# Altium PCB PCB_Thesis.PcbDoc
Units mil, origin at the board's own origin, x right, y up, seen from the top; angles counter-clockwise.
Board outline 3160 x 1935 mil, 2 copper layers (Top Layer, Bottom Layer); 15 components, 29 nets, 152 pads, 1 vias.
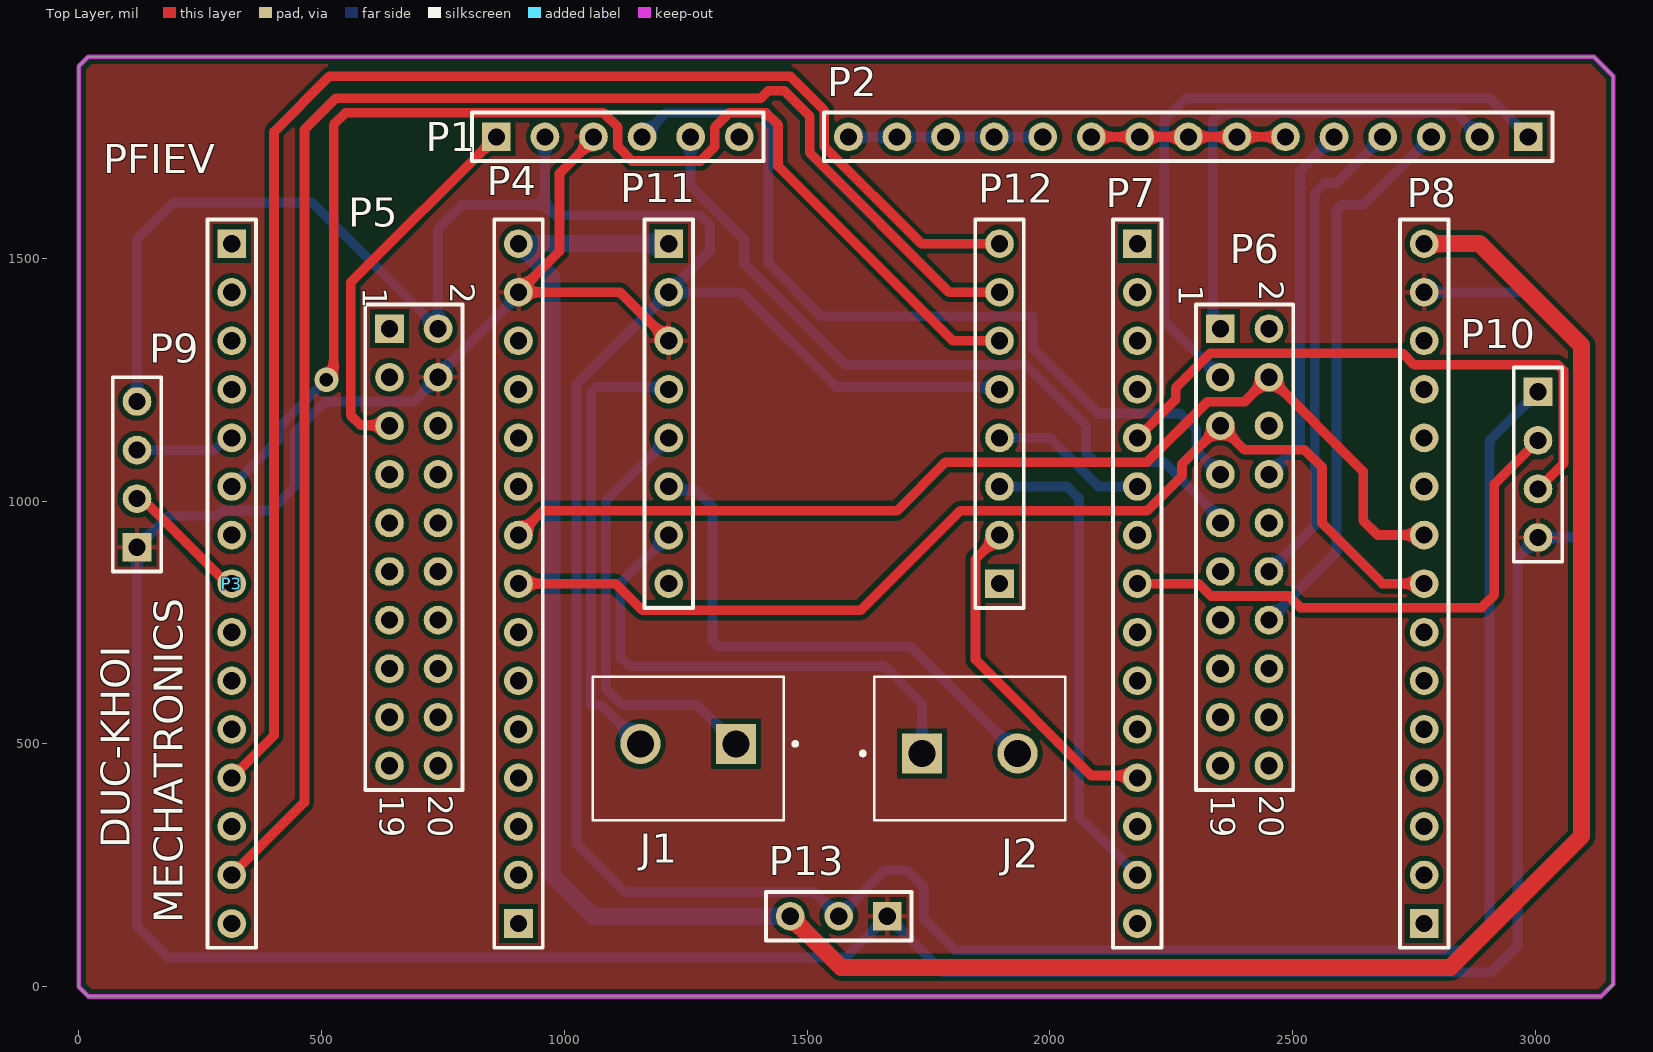
[diagram p0: Top Layer view]
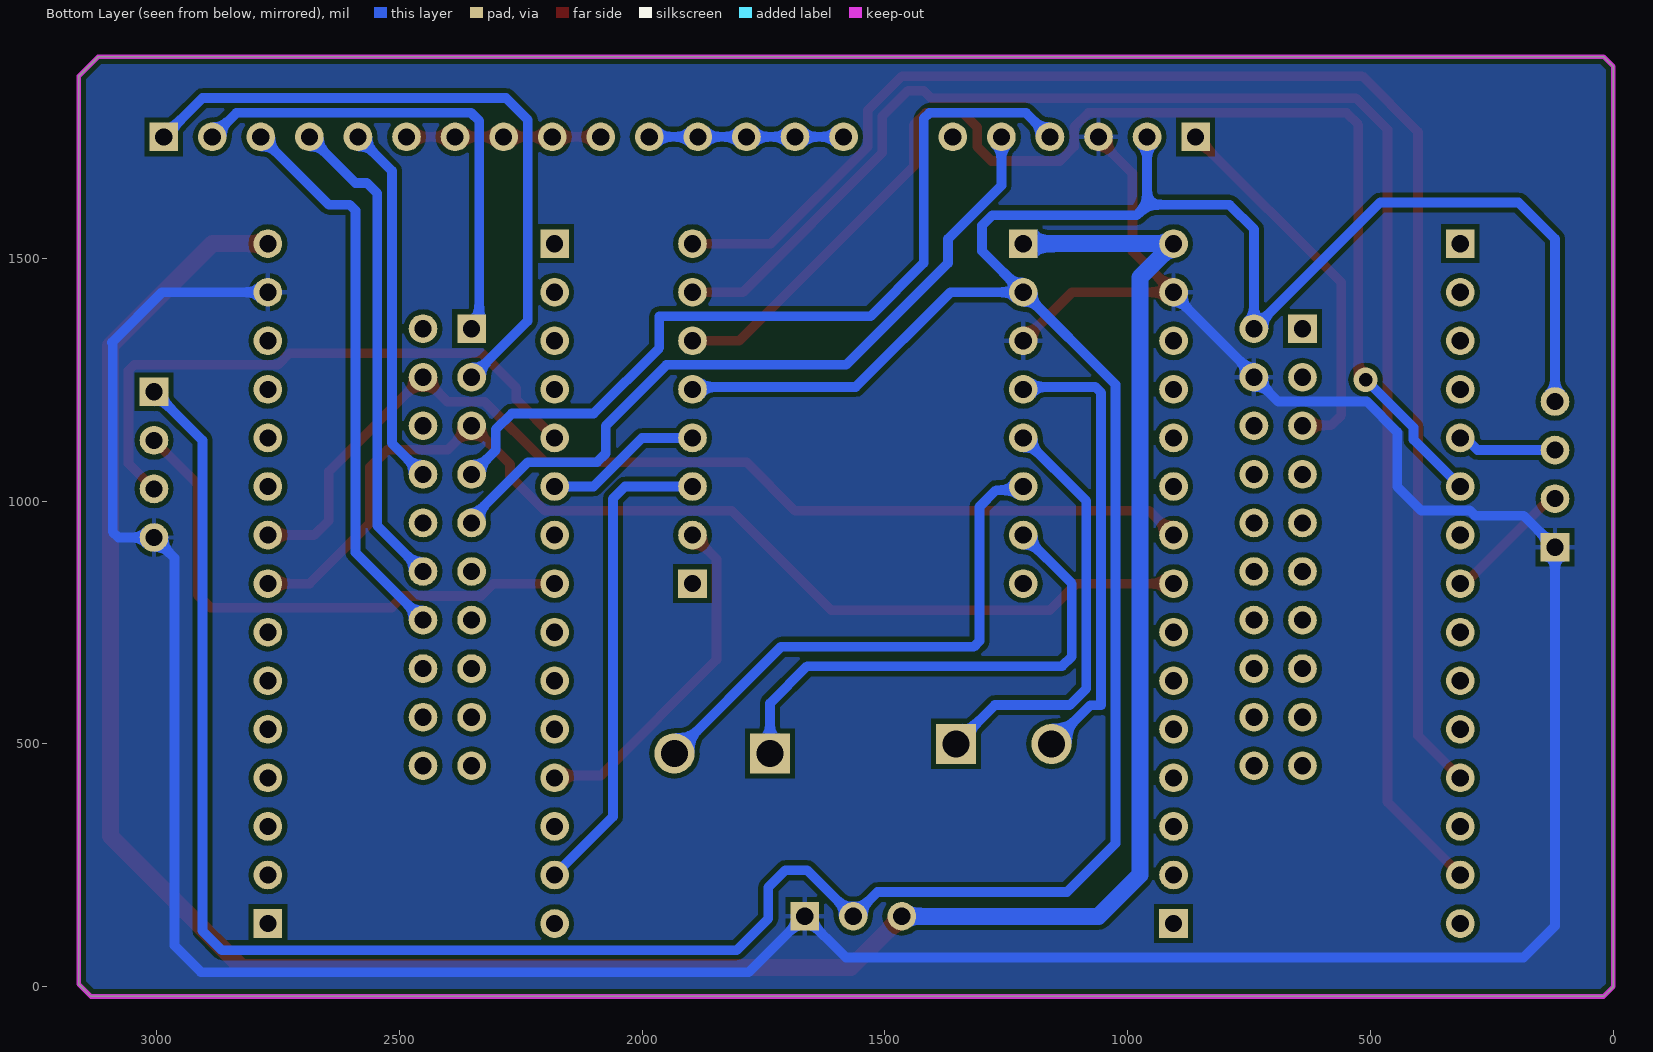
[diagram p1: Bottom Layer view, seen from below]

## Layer stack, top to bottom
Top Solder: solder mask 0.4, Solder Resist, Dk 3.5
Top Layer: signal copper 1.4
Dielectric 1: dielectric 12.6, FR-4, Dk 4.8
Bottom Layer: signal copper 1.4
Bottom Solder: solder mask 0.4, Solder Resist, Dk 3.5

## Board outline
0,0 20,-20 3135,-20 3160,5 3160,1875 3120,1915 20,1915 0,1895

## Design rules (kind name [scope] priority, off if disabled: settings)
Clearance [All] p1: gap=10 ignorepadtopadclearanceinfootprint=FALSE except(0: Arc-Hole Track-Hole SMDPad-Hole THPad-Hole Via-Hole Fill-Hole Poly-Hole Region-Hole Text-Hole)
PolygonConnect [All] p1: connectstyle=Relief reliefconductorwidth=10 reliefentries=4 polygonreliefangle="90 Angle" airgapwidth=10
RoomDefinition Schematic_Thesis [InComponentClass('Schematic_Thesis')] p1: confinementstyle=ConfineIn formatcopy=TRUE lockcomponents=FALSE outline -2575,-2075 -575,-2075 -575,-1075 -2575,-1075
RoutingVias [All] p1: holewidth=28 width=50 viastyle="Through Hole" minholewidth=28 minwidth=50 maxholewidth=28 maxwidth=50
SolderMaskExpansion [All] p1: expansion=4 istentingtop=FALSE
Width [All] p1: maxlimit=35 minlimit=20 preferedwidth=20
30 further rules are at their usual default settings.

## Components (designator, comment, footprint, x,y, rotation, side; value= is the part's Value field where it differs from the comment)
J1 "Domino 1" HANDSON_KF301-2P 1255,500 r180 top
J2 "Domino 2" HANDSON_KF301-2P 1835,480.32 r0 top
P1 "HC-05" HDR1X6 860,1750 r0 top
P2 "RC Servo" HDR1X15 2985,1750 r180 top
P3 "Arduino - L1" HDR1X15 315,1530 r270 top
P4 "Arduino - R1" HDR1X15 905.5,130 r90 top
P5 "Tiva C - L" HDR2X10 640,1355 r270 top
P6 "Tiva C - R" HDR2X10 2351,1355 r270 top
P7 "Arduino - L2" HDR1X15 2180,1530 r270 top
P8 "Arduino - R2" HDR1X15 2770.5,130 r90 top
P9 "Motor 1" HDR1X4 120,905 r90 top
P10 "Motor 2" HDR1X4 3005,1225 r270 top
P11 "TB6612 - L" HDR1X8 1215,1530 r270 top
P12 "TB6612 - R" HDR1X8 1896.1,830 r90 top
P13 "Voltage Supply" HDR1X3 1665,145 r180 top

## Footprints (in the part's own frame and the unit in brackets; to place one, negate y for a bottom-side part, rotate by r counter-clockwise, add the part's x,y. Pads: shape width x height; smd on the part's side, far side on the other; paste and mask are expansions set on the pad)
HANDSON_KF301-2P [mm]
  rect 2.1x2.1 hole 1.4: 1(-2.5,0)
  round 2.1 hole 1.4: 2(2.5,0)
  silkscreen extent -5.7,-3.5 5,4
HDR1X3 [mm] "Connector; Header; 3 Position"
  rect 1.5x1.5 hole 0.9: 1(0,0)
  round 1.5 hole 0.9: 2(2.54,0) 3(5.08,0)
  silkscreen extent -1.27,-1.27 6.35,1.27
HDR1X4 [mm] "Connector; Header; 4 Position"
  rect 1.5x1.5 hole 0.9: 1(0,0)
  round 1.5 hole 0.9: 2(2.54,0) 3(5.08,0) 4(7.62,0)
  silkscreen extent -1.27,-1.27 8.89,1.27
HDR1X6 [mm] "Connector; Header; 6 Position"
  rect 1.5x1.5 hole 0.9: 1(0,0)
  round 1.5 hole 0.9: 2(2.54,0) 3(5.08,0) 4(7.62,0) 5(10.16,0) 6(12.7,0)
  silkscreen extent -1.27,-1.27 13.97,1.27
HDR1X8 [mm] "Connector; Header; 8 Position"
  rect 1.5x1.5 hole 0.9: 1(0,0)
  round 1.5 hole 0.9: 2(2.54,0) 3(5.08,0) 4(7.62,0) 5(10.16,0) 6(12.7,0) 7(15.24,0) 8(17.78,0)
  silkscreen extent -1.27,-1.27 19.05,1.27
HDR1X15 [mm] "Connector; Header; 15 Position"
  rect 1.5x1.5 hole 0.9: 1(0,0)
  round 1.5 hole 0.9: 2(2.54,0) 3(5.08,0) 4(7.62,0) 5(10.16,0) 6(12.7,0) 7(15.24,0) 8(17.78,0) 9(20.32,0) 10(22.86,0) 11(25.4,0) 12(27.94,0) 13(30.48,0) 14(33.02,0) 15(35.56,0)
  silkscreen extent -1.27,-1.27 36.83,1.27
HDR2X10 [mm] "Connector; Header; 10x2 Position"
  rect 1.5x1.5 hole 0.9: 1(0,0)
  round 1.5 hole 0.9: 2(0,2.54) 3(2.54,0) 4(2.54,2.54) 5(5.08,0) 6(5.08,2.54) 7(7.62,0) 8(7.62,2.54) 9(10.16,0) 10(10.16,2.54) 11(12.7,0) 12(12.7,2.54) 13(15.24,0) 14(15.24,2.54) 15(17.78,0) 16(17.78,2.54) 17(20.32,0) 18(20.32,2.54) 19(22.86,0) 20(22.86,2.54)
  silkscreen extent -1.27,-1.27 24.13,3.81

## Part data
J1 J2: library part KF301-2P, "2 Pin Terminal Block 5mm Pitch", Package=Package, Availability=Unavailable, MF="Handson Technology", MP=KF301-2P, Price=None, SnapEDA_Link=https://www.snapeda.com/parts/KF301-2P/Handson%20Technology/view-part/4276957/?ref=snap
P1: library part "Header 6", "Header, 6-Pin", LatestRevisionDate=17-Jul-2002, LatestRevisionNote="Re-released for DXP Platform.", Publisher="Altium Limited"
P2 P3 P4 P7 P8: library part "Header 15", "Header, 15-Pin", LatestRevisionDate=17-Jul-2002, LatestRevisionNote="Re-released for DXP Platform.", Publisher="Altium Limited"
P5 P6: library part "Header 10X2", "Header, 10-Pin, Dual row", LatestRevisionDate=17-Jul-2002, LatestRevisionNote="Re-released for DXP Platform.", Publisher="Altium Limited"
P9 P10: library part "Header 4", "Header, 4-Pin", LatestRevisionDate=17-Jul-2002, LatestRevisionNote="Re-released for DXP Platform.", Publisher="Altium Limited"
P11 P12: library part "Header 8", "Header, 8-Pin", LatestRevisionDate=17-Jul-2002, LatestRevisionNote="Re-released for DXP Platform.", Publisher="Altium Limited"
P13: library part "Header 3", "Header, 3-Pin", LatestRevisionDate=17-Jul-2002, LatestRevisionNote="Re-released for DXP Platform.", Publisher="Altium Limited"

## Via types
v1: diameter 50, hole 28, Top Layer to Bottom Layer, 1 vias

## Nets (pads, with @x,y where several pads share a name; then routed paths per layer and width w, separated by ;. In a path a pad name is that pad's centre, name@x,y a point inside that pad or via, vN(x,y) a via of type N, cw(c..) or ccw(c..) an arc to the next point about the centre after c; other vN are vias at no path point)
5V: P1.2 P5.2 P9.4 P10.1 P11.2 P12.5 P13.2 | length 7443.4
  Bottom Layer w20: P9.4 120,1540 195,1615 480,1615 P5.2 740,1560 790,1610 960,1610 ; P1.2 960,1610 ; P12.5 1891.1,1235 1560,1235 1365,1430 P11.2 ; P10.1 2905,1125 2905,115 2865,75 1805,75 1740,140 1740,205 1705,240 1660,240 P13.2 1515,195 1125,195 1025,295 1025,1240 P11.2 ; 960,1610 981.21,1588.79 1278.79,1588.79 1300,1567.57 1300,1515 P11.2
12V: P4.15 P8.15 P11.1 P13.3 | length 5370.3
  Top Layer w35: P13.3 1570,40 2825,40 3095,310 3095,1320 2885,1530 P8.15
  Bottom Layer w35: P11.1 P4.15 975,1460.5 975,230 1060,145 P13.3
AN1: P3.6 P12.6 | length 2586.5
  Top Layer w20: v1(510,1250) 525,1265 525,1775 549.53,1799.53 1080.51,1799.53 1110,1770.04 1110,1729.96 1139.49,1700.47 1280.51,1700.47 1310,1729.96 1310,1770.04 1339.49,1799.53 1415.47,1799.53 1440,1775 1440,1690 1800,1330 P12.6
  Bottom Layer w20: P3.6 411.34,1126.34 411.34,1151.34 v1(510,1250)
AN2: P3.14 P12.7 | length 3277.1
  Top Layer w20: P3.14 465,380 465,1765 529.53,1829.53 1404.53,1829.53 1420,1845 1452.43,1845 1505.47,1791.95 1505.47,1717.06 1792.53,1430 P12.7
BIN1: P7.6 P12.4 | length 325.3
  Bottom Layer w20: P12.4 2000,1130 2100,1030 P7.6
BIN2: P7.14 P12.3 | length 999
  Bottom Layer w20: P12.3 2035,1030 2060,1005 2060,350 P7.14
EN1A: P3.5 P9.3 | length 205.4
  Bottom Layer w20: P9.3 279.43,1105 304.43,1130 P3.5
EN1B: P3.8 P9.2 | length 267.5
  Top Layer w20: P9.2 130,1005 305,830 P3.8
EN2A: P7.8 P10.2 | length 1121.9
  Top Layer w20: P7.8 2305.96,830 2331.43,804.53 2491.5,804.53 2515.56,780.47 2888.76,780.47 2915,806.72 2915,1035 P10.2
EN2B: P7.5 P10.3 | length 1244.2
  Top Layer w20: P7.5 2258.98,1208.98 2258.98,1233.02 2330.48,1304.53 2725.93,1304.53 2749.98,1280.47 3045.78,1280.47 3057.5,1268.76 3057.5,1077.5 P10.3
EN(KEY): P1.1 P5.5 | length 786.5
  Top Layer w20: P5.5 638.76,1156.24 580.47,1156.24 560,1176.72 560,1450 P1.1
GND: P1.3 P4.14 P5.4 P8.14 P9.1 P10.4 P11.3 P13.1 | length 7267.1
  Top Layer w20: P1.3 1060,1745 990,1675 990,1514.5 P4.14 1115,1430 P11.3
  Bottom Layer w20: P4.14 905.5,1425.5 740,1260 P5.4 690,1205 507.43,1205 445,1142.57 445,1030 395.47,980.47 295.43,980.47 284.96,970 185,970 P9.1 120,125 185,60 1580,60 P13.1 1780,30 2908.28,30 2962.91,84.62 2962.91,882.91 P10.4 3078.28,925 3090,936.72 3090,1325 3091.72,1326.72 2988.43,1430 P8.14
M1: J1.2 P11.4 | length 954.9
  Bottom Layer w20: J1.2@1146.97,500 J1.2 1077.29,579.29 1055,579.29 1055,1223.28 1066.72,1235 1210,1235 P11.4
M2: J1.1 P11.5 | length 885.5
  Bottom Layer w20: P11.5 1085,1000 1085,614 1119,580 1273.43,580 J1.1
M3: J2.1 P11.7 | length 1056.1
  Bottom Layer w20: P11.7 1115,830 1115,680 1135,660 1660,660 1736.57,583.43 J2.1
M4: J2.2 P11.6 | length 1108.1
  Bottom Layer w20: P11.6 1222.47,1022.53 1270.76,1022.53 1305,988.28 1305,711.72 1316.72,700 1713.74,700 J2.2
NetP2_6: P2.6 P2.7 P2.8 P2.9 P2.10 | length 400
  Top Layer w20: P2.10 P2.9 P2.8 P2.7 P2.6
NetP2_11: P2.11 P2.12 P2.13 P2.14 P2.15 | length 400
  Bottom Layer w20: P2.15 P2.14 P2.13 P2.12 P2.11
PWM1: P2.2 P6.1 | length 1011.5
  Bottom Layer w20: P6.1 2335.47,1370.53 2335.47,1783.28 2351.72,1799.53 2835.47,1799.53 P2.2
PWM2: P2.1 P6.3 | length 1379.4
  Bottom Layer w20: P6.3 2235.47,1370.53 2235.47,1785.47 2280,1830 2905,1830 P2.1
PWM3: P2.3 P6.14 | length 1158.7
  Bottom Layer w20: P6.14 2590,894 2590,1598.28 2601.72,1610 2645,1610 P2.3
PWM4: P2.4 P6.12 | length 1005.6
  Bottom Layer w20: P6.12 2545,949 2545,1633.28 2566.72,1655 2590,1655 P2.4
PWM5: P2.5 P6.8 | length 750.5
  Bottom Layer w20: P6.8 2515,1119 2515,1680 P2.5
PWMA: P3.12 P12.8 | length 3094.7
  Top Layer w20: P3.12 402.09,517.09 402.09,1760.38 516.72,1875 1464.85,1875 1535.47,1804.38 1535.47,1729.49 1734.96,1530 P12.8
PWMB: P7.12 P12.2 | length 711.3
  Top Layer w20: P12.2 1846.57,880.47 1846.57,673.43 2085,435 2175,435 P7.12
RX: P1.5 P6.9 | length 1547.2
  Bottom Layer w20: P1.5 1260,1650 1370,1540 1370,1490 1579.53,1280.47 1949.53,1280.47 2075,1155 2075,1097.43 2092.43,1080 2235,1080 2351,964 P6.9
SCL: P4.9 P6.4 P8.9 | length 2193.4
  Top Layer w20: P4.9 955.5,980 1685,980 1785,1080 2200.04,1080 2324.57,1204.53 2400.53,1204.53 P6.4 2645,1061 2645,960 2675,930 P8.9
SDA: P4.8 P6.5 P8.8 | length 2261.3
  Top Layer w20: P4.8 1105.53,830 1160.53,775 1610,775 1815,980 2200.04,980 2272.02,1051.98 2272.02,1076.02 P6.5 2400.53,1105.47 2524.53,1105.47 2560,1070 2560,955 2685,830 P8.8
TX: P1.4 P6.7 | length 1757.5
  Bottom Layer w20: P1.4 1209.53,1799.53 1408.28,1799.53 1420,1787.81 1420,1490 1529.53,1380.47 1964.53,1380.47 1964.53,1315.47 2099.53,1180.47 2268.28,1180.47 2301.47,1147.28 2301.47,1104.53 P6.7
pads on no net: P1.6 P3.1 P3.2 P3.3 P3.4 P3.7 P3.9 P3.10 P3.11 P3.13 P3.15 P4.1 P4.2 P4.3 P4.4 P4.5 P4.6 P4.7 P4.10 P4.11 P4.12 P4.13 P5.1 P5.3 P5.6 P5.7 P5.8 P5.9 P5.10 P5.11 P5.12 P5.13 P5.14 P5.15 P5.16 P5.17 P5.18 P5.19 P5.20 P6.2 P6.6 P6.10 P6.11 P6.13 P6.15 P6.16 P6.17 P6.18 P6.19 P6.20 P7.1 P7.2 P7.3 P7.4 P7.7 P7.9 P7.10 P7.11 P7.13 P7.15 P8.1 P8.2 P8.3 P8.4 P8.5 P8.6 P8.7 P8.10 P8.11 P8.12 P8.13 P11.8 P12.1

## Polygon pours and split planes (outlines as drawn)
GND on Top Layer "Bottom Polygon" (solid, remove dead copper, pour order 12): 20,1915 0,1895 0,0 20,-20 3135,-20 3160,5 3160,1870 3120,1910 3120,1915
GND on Top Layer "Top Polygon" (solid, remove dead copper, pour order 6): 265,1675
no net on Top Layer "NONET_L01_P000" (solid, pour order 0): 1460,1135
GND on Bottom Layer "Bottom Polygon" (solid, remove dead copper, pour order 11): 20,1915 0,1895 0,0 20,-20 3135,-20 3160,5 3160,1875 3120,1915
GND on Bottom Layer "Top Polygon" (solid, remove dead copper, pour order 7): 470,880

## Keep-outs
Keep-Out Layer:
  lines w10: 0,0 20,-20 3135,-20 3160,5 3160,1815 3160,1865 3160,1875 3120,1915 3090,1915 20,1915 0,1895 0,1735 0,0

## Silkscreen, mask and mechanical layers (free items; w line width, h text height)
Top Overlay:
  text "PFIEV" at 50,1675 h60
  text "DUC-KHOI" at 105,285 h60 r90
  text "MECHATRONICS" at 214.27,131.03 h60 r90

## Text inside footprints (layer, text, board x,y; h text height)
P5: Top Overlay "2" at 765,1450 h50 r270; Top Overlay "1" at 585,1440 h50 r270; Top Overlay "19" at 620,395 h50 r270; Top Overlay "20" at 720,395 h50 r270
P6: Top Overlay "2" at 2431,1455 h50 r270; Top Overlay "1" at 2265,1445 h50 r270; Top Overlay "19" at 2331,395 h50 r270; Top Overlay "20" at 2431,395 h50 r270